# Altium PCB ESP32-38PIN.PcbDoc
Units mm, origin at the board's own origin, x right, y up, seen from the top; angles counter-clockwise.
Board outline 67.9 x 97.1 mm, 2 copper layers (Top Layer, Bottom Layer); 17 components, 39 nets, 187 pads, 12 vias.
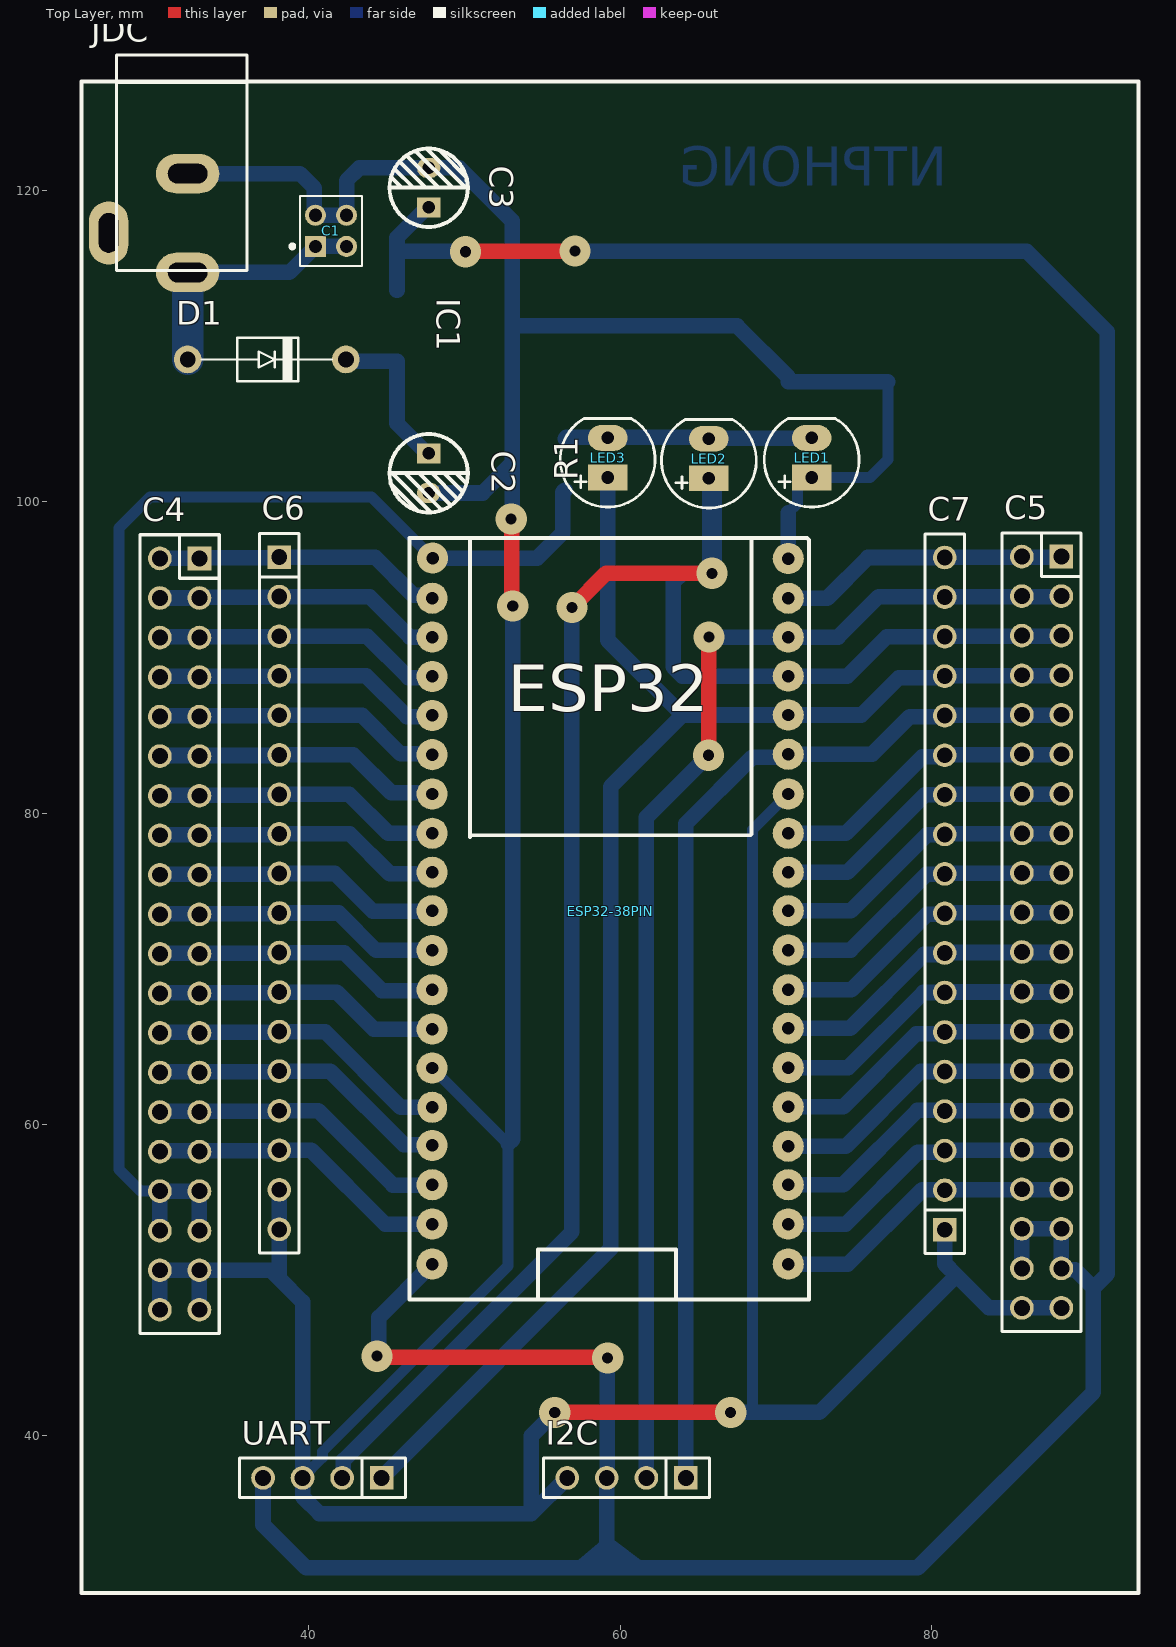
[diagram p0: Top Layer view]
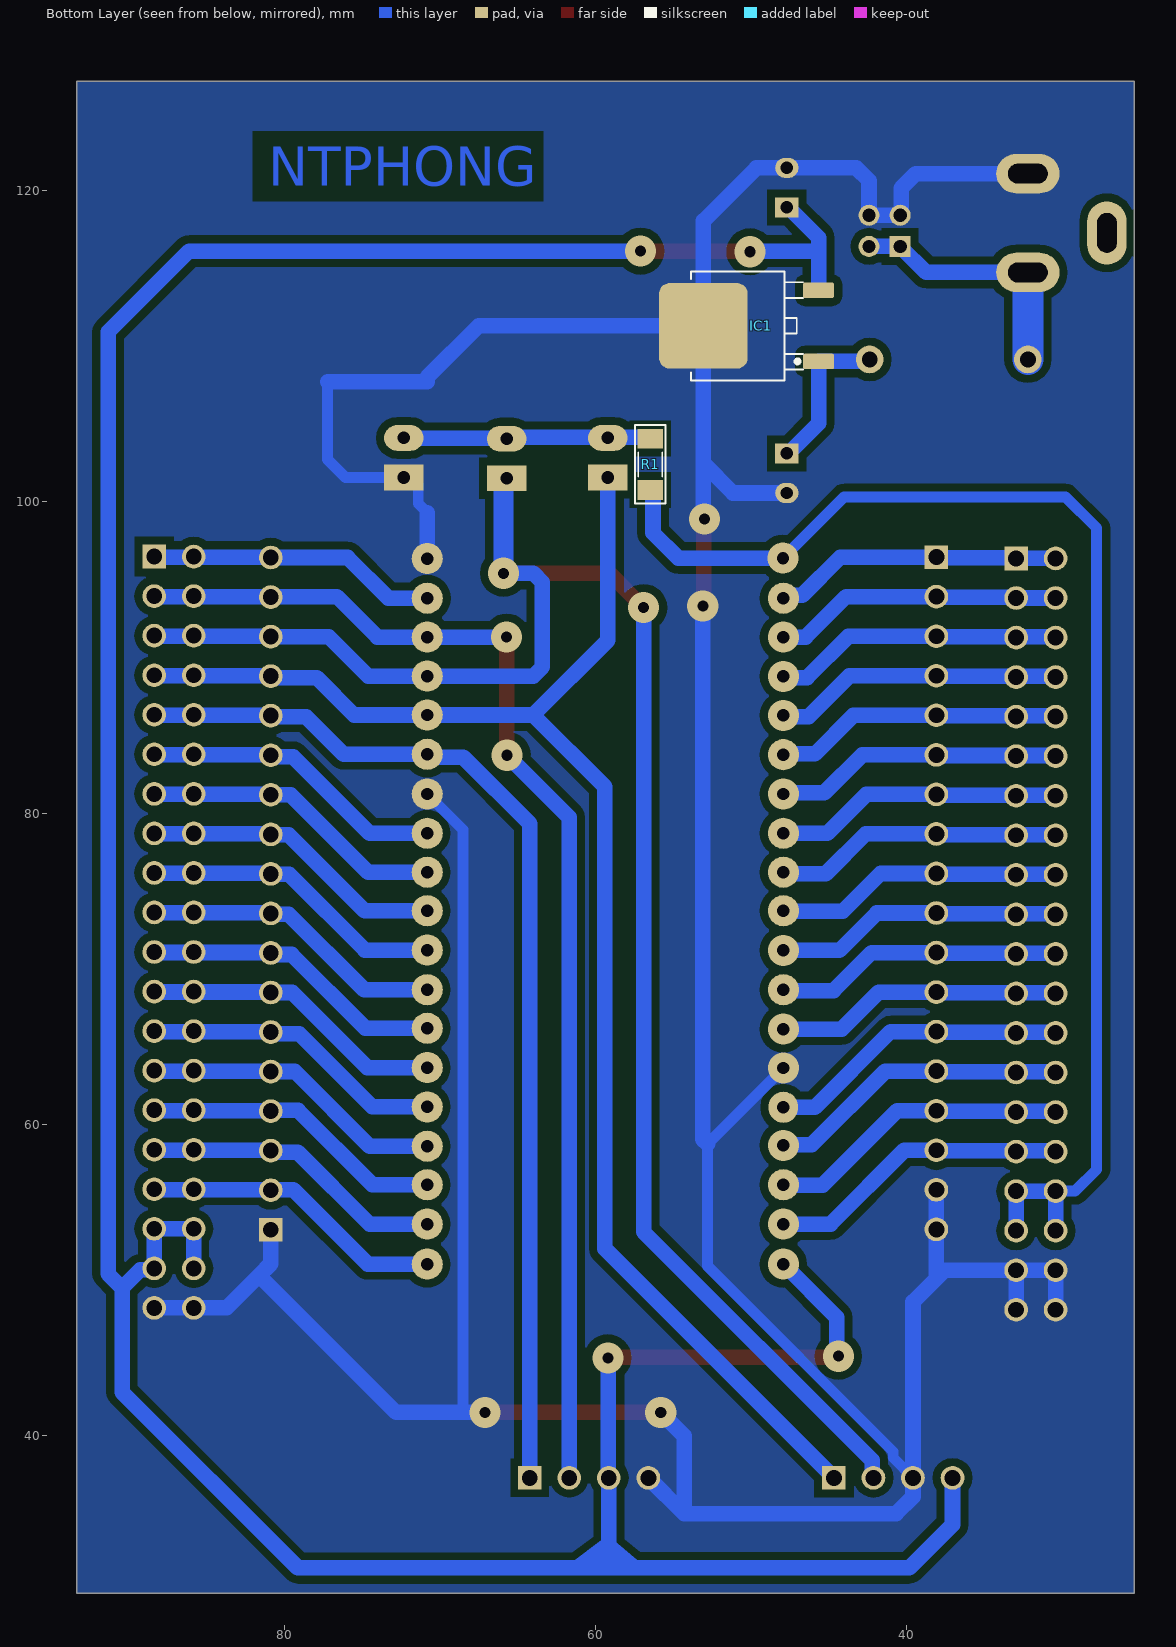
[diagram p1: Bottom Layer view, seen from below]
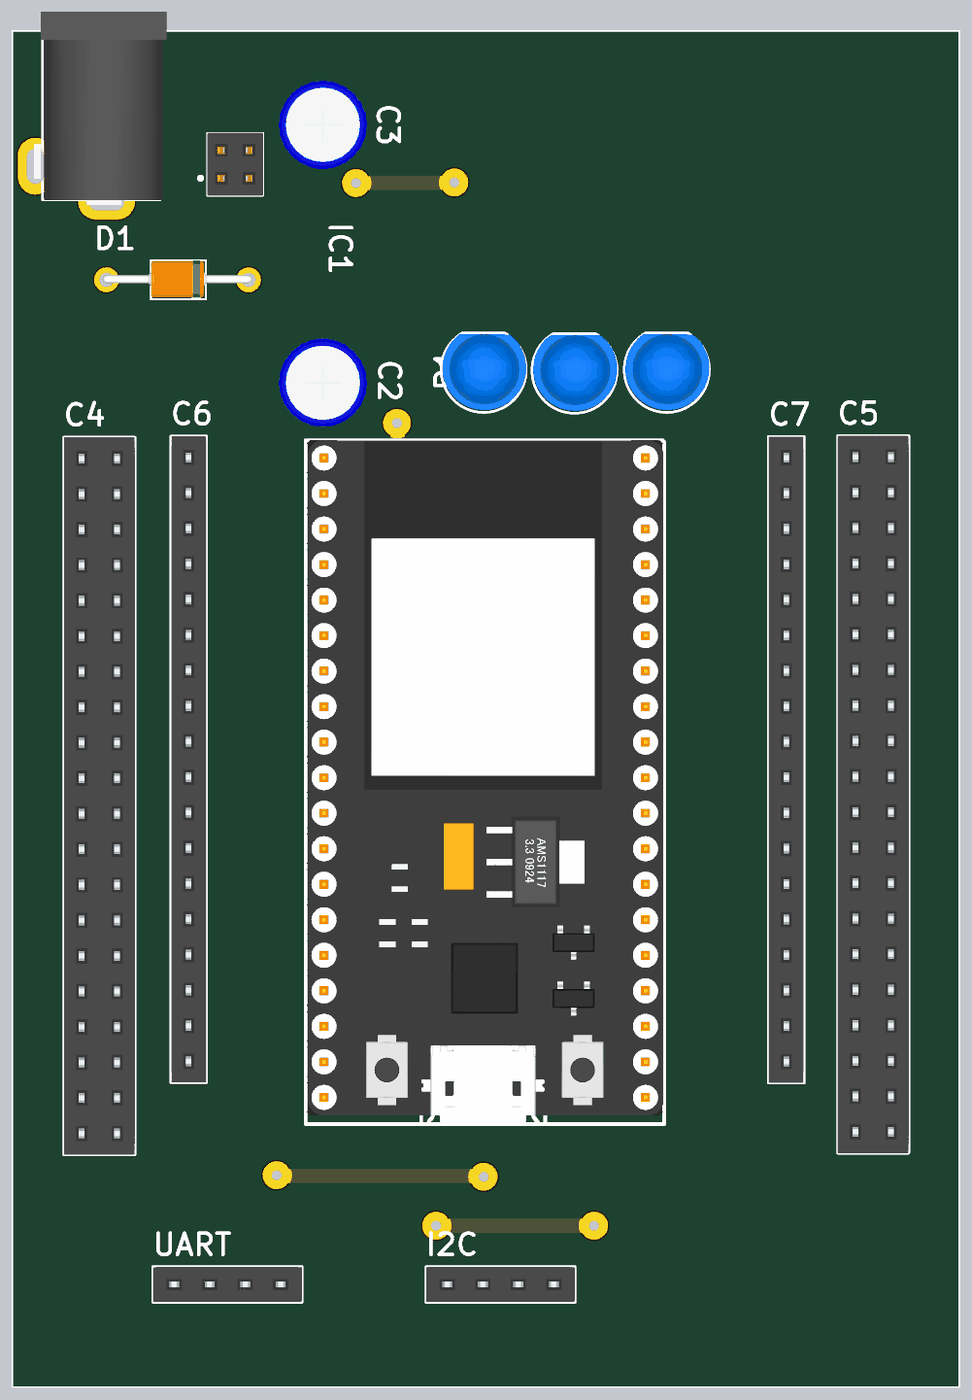
[diagram p2: 3D render of the assembled board from above, using the file's embedded part models]

## Layer stack, top to bottom
Top Solder: solder mask 0.0102, Solder Resist, Dk 3.5
Top Layer: signal copper 0.0356
Dielectric 1: dielectric 0.32, FR-4, Dk 4.8
Bottom Layer: signal copper 0.0356
Bottom Solder: solder mask 0.0102, Solder Resist, Dk 3.5

## Board outline
25.4,29.9 93.3,29.9 93.3,127 25.4,127

## Design rules (kind name [scope] priority, off if disabled: settings)
Clearance [All] p1: gap=0.5 ignorepadtopadclearanceinfootprint=FALSE
PlaneConnect [All] p1: planeconnectstyle=Direct reliefexpansion=0.508 reliefentries=4 reliefconductorwidth=0.254 reliefairgap=0.254
PolygonConnect [All] p1: connectstyle=Direct reliefconductorwidth=0.254 reliefentries=4 polygonreliefangle="90 Angle" airgapwidth=0.254
RoutingVias [All] p1: holewidth=0.711 width=2 viastyle="Through Hole" minholewidth=0.711 minwidth=1 maxholewidth=0.711 maxwidth=8
SolderMaskExpansion [All] p1: expansion=0.102 istentingtop=FALSE
Width [All] p1: maxlimit=5 minlimit=0.254 preferedwidth=0.7 minimp=50.000000 maximp=50.000000 favimp=50.000000
29 further rules are at their usual default settings.

## Components (designator, comment, footprint, x,y, rotation, side; value= is the part's Value field where it differs from the comment)
C1 "JP2x2-2.0" J2-C2T 41.425,117.4 r90 top
C2 "100uF" "tu hoa 5mm" 47.7,101.83 r270 top
C3 "100uF" "tu hoa 5mm" 47.7,120.17 r90 top
C4 "JP20x2" JP20-C2T 31.705,72.225 r270 top
C5 "JP20x2" JP20-C2T 87.07,72.345 r270 top
C6 "JP18" JP18-C1T 38.1,96.44 r270 top
C7 "JP18" JP18-C1T 80.85,53.235 r90 top
D1 "Diode" DIO-1A 32.221,109.137 r0 top value=1N5007
ESP32-38PIN "ESP32-38PIN" ESP32-38PIN 47.95,96.375 r0 top
I2C "JP4" JP4-C1T 64.22,37.3 r180 top
IC1 "LM78xx" TO252-123 49.366,111.296 r90 bottom
JDC "Jac DC" DC0 29.681,117.9 r270 top
LED1 "LED" LED-5-BLUE 72.3,102.7 r90 top value="LED 3 ly Single Colour"
LED2 "LED" LED-5-BLUE 65.7,102.643 r90 top value="LED 3 ly Single Colour"
LED3 "LED" LED-5-BLUE 59.2,102.7 r90 top value="LED 3 ly Single Colour"
R1 "68R" RES-SMD-1206 56.474,102.4 r90 bottom
UART "JP4" JP4-C1T 44.68,37.3 r180 top

## Footprints (in the part's own frame and the unit in brackets; to place one, negate y for a bottom-side part, rotate by r counter-clockwise, add the part's x,y. Pads: shape width x height; smd on the part's side, far side on the other; paste and mask are expansions set on the pad)
DC0 [mil] "Jac DC input"
  oval 100x160 hole 50 slot 100 at 90 deg: 1(125,100) 2(-125,100)
  oval 160x100 hole 50 slot 100 at 0 deg: 3(25,-100)
  silkscreen extent -425,-80 120,250, body extent -410,-105 134,269, height 434
DIO-1A [mil]
  round 70 hole 40: 1(0,0) 2(400,0)
  silkscreen extent 35,-55 365,55, body extent -11,-50 411,54, height 102
ESP32-38PIN [mm] "ESP32-38PIN"
  round 2 hole 0.8: 1(0,0) 2(-0.025,-2.575) 3(-0.025,-5.075) 4(-0.025,-7.6) 5(-0.025,-10.1) 6(-0.025,-12.625) 7(-0.025,-15.15) 8(-0.025,-17.675) 9(-0.025,-20.175) 10(-0.025,-22.65) 11(-0.025,-25.2) 12(-0.025,-27.725) 13(-0.025,-30.25) 14(-0.025,-32.75) 16(-0.025,-37.725) 17(-0.025,-40.25) 18(-0.025,-42.775) 19(-0.025,-45.35) 20(22.85,-45.35) 21(22.85,-42.775) 22(22.85,-40.25) 23(22.85,-37.775) 24(22.85,-35.25) 25(22.85,-32.725) 26(22.85,-30.2) 27(22.85,-27.725) 28(22.85,-25.175) 29(22.85,-22.65) 30(22.85,-20.175) 31(22.85,-17.675) 32(22.85,-15.15) 33(22.85,-12.6) 34(22.85,-10.075) 35(22.85,-7.575) 36(22.85,-5.075) 37(22.85,-2.575) 38(22.85,-0.025)
  oval 1.9x2 hole 0.8: 15(-0.025,-35.275)
  silkscreen extent -1.48,-47.61 24.17,1.29, body extent -1.44,-47.61 24.11,1.29, height 4.63
J2-C2T [mm] "4 pins, dual row, straight, gold plating"
  rect 1.35x1.35 hole 0.85: 1(-1,1)
  round 1.35 hole 0.85: 2(1,1) 3(1,-1) 4(-1,-1)
  silkscreen extent -2.25,-2 2.25,2.61, body extent -2.25,-2 2.25,2, height 4.31
JP4-C1T [mm] "4 row, straight, gold plating"
  rect 1.52x1.52 hole 1.02: 1(0,0)
  round 1.52 hole 1.02: 2(2.54,0) 3(5.08,0) 4(7.62,0)
  silkscreen extent -1.52,-1.27 9.14,1.27, body extent -1.52,-1.25 9.14,1.25, height 8.51
JP18-C1T [mm] "18 row, straight, gold plating"
  rect 1.52x1.52 hole 1.02: 1(0,0)
  round 1.52 hole 1.02: 2(2.54,0) 3(5.08,0) 4(7.62,0) 5(10.16,0) 6(12.7,0) 7(15.24,0) 8(17.78,0) 9(20.32,0) 10(22.86,0) 11(25.4,0) 12(27.94,0) 13(30.48,0) 14(33.02,0) 15(35.56,0) 16(38.1,0) 17(40.64,0) 18(43.18,0)
  silkscreen extent -1.52,-1.27 44.7,1.27, body extent -1.52,-1.25 44.7,1.25, height 8.51
JP20-C2T [mm] "40 pins, dual row, straight, gold plating"
  rect 1.52x1.52 hole 1.02: 1(-24.13,1.27)
  round 1.52 hole 1.02: 2(-21.59,1.27) 3(-19.05,1.27) 4(-16.51,1.27) 5(-13.97,1.27) 6(-11.43,1.27) 7(-8.89,1.27) 8(-6.35,1.27) 9(-3.81,1.27) 10(-1.27,1.27) 11(1.27,1.27) 12(3.81,1.27) 13(6.35,1.27) 14(8.89,1.27) 15(11.43,1.27) 16(13.97,1.27) 17(16.51,1.27) 18(19.05,1.27) 19(21.59,1.27) 20(24.13,1.27) 21(24.13,-1.27) 22(21.59,-1.27) 23(19.05,-1.27) 24(16.51,-1.27) 25(13.97,-1.27) 26(11.43,-1.27) 27(8.89,-1.27) 28(6.35,-1.27) 29(3.81,-1.27) 30(1.27,-1.27) 31(-1.27,-1.27) 32(-3.81,-1.27) 33(-6.35,-1.27) 34(-8.89,-1.27) 35(-11.43,-1.27) 36(-13.97,-1.27) 37(-16.51,-1.27) 38(-19.05,-1.27) 39(-21.59,-1.27) 40(-24.13,-1.27)
  silkscreen extent -25.65,-2.54 25.65,2.54, body extent -25.65,-2.54 25.65,2.54, height 8.51
LED-5-BLUE [mil] "LED 2 PIN, 5 ly , Only colour, pin to pin 110mil"
  rect 65x100 hole 32: 1(-45,0)
  oval 65x100 hole 32: 2(55,0)
  silkscreen extent -120,-120 104,120, body extent -113,-120 100,116, height 339
RES-SMD-1206 [mil]
  rect 50x65 smd: 1(-65,0) 2(65,0)
  silkscreen extent -99,-38 99,39, body extent -63,-31 63,32, height 40
TO252-123 [mm]
  round 0.5 on Mech15: 0(0,0)
  rrect25% 1x2 smd: 1(-2.285,-3.7) 3(2.285,-3.7)
  rrect25% 5.5x5.7 smd: 2(0,3.7)
  silkscreen extent -3.5,-2.7 3.5,4.5, body extent -3.3,-3.95 3.3,5.76, height 2.31
"tu hoa 5mm" [mm]
  rect 1.3x1.5 hole 0.8: 1(-1.27,0)
  oval 1.3x1.5 hole 0.8: 2(1.27,0)
  silkscreen extent -2.51,-2.51 2.51,2.51, body extent -3.12,-3.18 3.23,3.18, height 14.55

## Part data
C1: "WR-PHD 2.00 mm Dual Pin Header", Manufacturer="W¨¹rth Elektronik eiSos GmbH", partNo=62000421121, ComponentLink1 Description=Manufacturer, ComponentLink1URL=http://www.we-online.com, ComponentLink2 Description=Datasheet, ComponentLink2URL=http://katalog.we-online.de/em/datasheet/6200xx21121.pdf, Created by="Karrer Zheng", Created Date="2 April 2013", NoPins=04
C2 C3: library part "Tu Hoa 100uF 16V 5x11", "Cắm", Chung_Loai=Cắm, Don_Vi=Con, Ma_Hang=MH008417, So_Chan=2, Ten_Linh_Kien="Tụ Hóa 100uF 16V 5x11MM"
C4 C5: "WR-PHD 2.54 mm Dual Socket Header", Manufacturer="W¨¹rth Elektronik eiSos GmbH", partNo=61304021821, ComponentLink1 Description=Manufacturer, ComponentLink1URL=http://www.we-online.com, ComponentLink2 Description=Datasheet, ComponentLink2URL=http://katalog.we-online.de/em/datasheet/6130xx21821.pdf, Created by="Karrer Zheng", Created Date="29 March 2013", NoPins=40
C6 C7: "WR-PHD 2.54 mm Angled Socket Header", Manufacturer="W¨¹rth Elektronik eiSos GmbH", partNo=613018143121, ComponentLink1 Description=Manufacturer, ComponentLink1URL=http://www.we-online.com, ComponentLink2 Description=Datasheet, ComponentLink2URL=http://katalog.we-online.de/em/datasheet/6130xx143121.pdf, Created by="Karrer Zheng", Created Date="29 March 2013", NoPins=18
D1: "Default Diode", Code - JEDEC=DO-214-AB, Published=8-Jun-2000, Publisher="Altium Limited", Revision="July-2002: Re-released for DXP Platform."
I2C UART: "WR-PHD 2.54 mm Angled Socket Header", Manufacturer="W¨¹rth Elektronik eiSos GmbH", partNo=613004143121, ComponentLink1 Description=Manufacturer, ComponentLink1URL=http://www.we-online.com, ComponentLink2 Description=Datasheet, ComponentLink2URL=http://katalog.we-online.de/em/datasheet/6130xx143121.pdf, Created by="Karrer Zheng", Created Date="29 March 2013", NoPins=04
IC1: "Positive Voltage Regulator", ComponentLink1Description="Manufacturer Link", ComponentLink1URL=http://www.st.com/, ComponentLink2Description=Datasheet, ComponentLink2URL=http://www.st.com/stonline/products/literature/ds/2146/l78m05c.pdf, DatasheetVersion=Apr-1994, LatestRevisionDate=17-Jul-2002, LatestRevisionNote="Re-released for DXP Platform.", Note="Tab is connected to pin 3 (GND).", PackageDescription="TO, Thru-Hole, Vertical, Heatsink Mounted; 3 In-Line Leads; Pitch 2.54 mm; Pin sequence 1, 3, 2", PackageReference=ISOWATT220AB, PackageVersion=Jul-1998, Published=24-Aug-2001, Publisher="Altium Limited"
JDC: library part DCIN, "Jac DC input"
LED1 LED2 LED3: "LED Single colour Green and Red"
R1: library part Res-SMD, "Resistor", Manufacturer="Generic Components", Class=Passive, Published=08/06/2000, Publisher="Altium Hobart Technology Centre"

## Via types
v1: diameter 2, hole 0.711, Top Layer to Bottom Layer, 12 vias

## Nets (pads, with @x,y where several pads share a name; then routed paths per layer and width w, separated by ;. In a path a pad name is that pad's centre, name@x,y a point inside that pad or via, vN(x,y) a via of type N, cw(c..) or ccw(c..) an arc to the next point about the centre after c; other vN are vias at no path point)
+3.3: C4.17 C4.18 C4.23 C4.24 ESP32-38PIN.1 R1.1 | length 86.5
  Bottom Layer w0.7: C4.24 29.185,55.715 27.8,57.1 27.8,98.3 29.8,100.3 44.025,100.3 ESP32-38PIN.1
  Bottom Layer w1: C4.23 C4.24 C4.17 C4.18 ; ESP32-38PIN.1 54.675,96.375 56.3,98 56.3,100.614 56.435,100.749 R1.1
+5: C3.1 C5.18 C5.19 C5.22 C5.23 ESP32-38PIN.19 I2C.3 IC1.3 UART.4 | length 230.6
  Top Layer w1: v1(44.387,45.113) 44.45,45.05 59.15,45.05 v1(59.2,45) ; v1(50.068,116.057) 50.09,116.078 57.078,116.078 v1(57.1,116.1)
  Bottom Layer w1: UART.4 37.06,34.286 39.827,31.519 59.14,31.519 ; v1(44.387,45.113) 44.5,45.225 44.5,47.6 ESP32-38PIN.19 ; IC1.3 45.666,116.1 ; C3.1 47.6,118.9 45.666,116.966 45.666,116.1 ; v1(50.068,116.057) 50.025,116.1 45.666,116.1 ; v1(57.1,116.1) 86.1,116.1 91.3,110.9 91.3,50.4 90.4,49.5 ; v1(59.2,45) 59.17,44.97 59.17,37.33 I2C.3 59.14,31.519 ; C5.22 C5.23 C5.18 C5.19 88.439,50.656 89.245,50.656 90.4,49.5 ; 59.14,31.519 79.119,31.519 90.4,42.8 90.4,49.5
GND: C1.2 C1.3 C2.2 C3.2 C4.19 C4.20 C4.21 C4.22 C5.20 C5.21 C6.17 C6.18 C7.1 ESP32-38PIN.14 ESP32-38PIN.32 ESP32-38PIN.38 I2C.4 IC1.2 JDC.2 LED1.1 UART.3 | length 308.1
  Top Layer w1: v1(53,98.9) 53.05,98.85 53.05,93.35 v1(53.1,93.3) ; v1(55.8,41.5) v1(67.1,41.5)
  Bottom Layer w0.7: UART.3 39.6,37.324 40.868,38.592 40.868,38.977 52.8,50.909 52.8,58.75 ESP32-38PIN.14 ; 68.5,41.5 68.5,78.925 ESP32-38PIN.32 ; 70.8,99.3 71.38,99.88 71.38,101.082 71.856,101.557 LED1.1 76.057,101.557 77.2,102.7 77.2,107.7
  Bottom Layer w1: C4.21 C4.22 C4.19 ; JDC.2 39.425,121.075 40.358,120.142 40.358,118.467 C1.2 C1.3 42.425,120.625 43.24,121.44 C3.2 49.66,121.44 53.066,118.034 IC1.2 ; C4.20 C4.19 ; C6.17 C6.18 38.1,50.1 ; C2.2 51.16,100.56 53.066,102.466 ; 52.8,58.75 53.1,59.05 v1(53.1,93.3) ; v1(53,98.9) 53.066,98.966 53.066,102.466 ; v1(55.8,41.5) 54.3,40 54.3,35 ; I2C.4 54.3,35 ; v1(67.1,41.5) 68.5,41.5 72.8,41.5 81.6,50.3 ; ESP32-38PIN.38 70.8,99.3 ; 70.8,107.7 77.2,107.7 ; 70.8,108 67.504,111.296 IC1.2 ; C7.1 80.85,51.05 81.6,50.3 ; C5.20 C5.21 83.685,48.215 81.6,50.3 ; C4.19 37.565,50.635 38.1,50.1 ; 38.1,50.1 39.6,48.6 UART.3 39.6,36.086 40.686,35 54.3,35 ; 53.066,102.466 IC1.2
NetC1_1: C1.1 C1.4 D1.1 JDC.1 | length 16.5
  Bottom Layer w1: JDC.1 38.75,114.725 C1.1 C1.4
  Bottom Layer w2: D1.1 JDC.1
NetC2_1: C2.1 D1.2 IC1.1 | length 10.1
  Bottom Layer w1: D1.2 42.507,109.011 IC1.1 45.666,105.034 47.6,103.1 C2.1
NetC4_1: C4.1 C4.40 C6.1 ESP32-38PIN.2 | length 18.6
  Bottom Layer w1: C4.40 C4.1 33.017,96.397 38.057,96.397 C6.1 44.26,96.44 46.709,93.991 47.734,93.991 ESP32-38PIN.2
NetC4_2: C4.2 C4.39 C6.2 ESP32-38PIN.3 | length 18.6
  Bottom Layer w1: C4.39 C4.2 33.017,93.857 38.057,93.857 C6.2 43.9,93.9 46.5,91.3 ESP32-38PIN.3
NetC4_3: C4.3 C4.38 C6.3 ESP32-38PIN.4 | length 18.7
  Bottom Layer w1: C4.38 30.477,91.317 38.057,91.317 C6.3 43.74,91.36 46.4,88.7 47.85,88.7 ESP32-38PIN.4
NetC4_4: C4.4 C4.37 C6.4 ESP32-38PIN.5 | length 18.6
  Bottom Layer w1: C4.37 30.477,88.777 38.057,88.777 C6.4 43.68,88.82 46.3,86.2 47.85,86.2 ESP32-38PIN.5
NetC4_5: C4.5 C4.36 C6.5 ESP32-38PIN.6 | length 18.6
  Bottom Layer w1: C4.36 30.477,86.237 38.057,86.237 C6.5 43.42,86.28 45.9,83.8 47.875,83.8 ESP32-38PIN.6
NetC4_6: C4.6 C4.35 C6.6 ESP32-38PIN.7 | length 18.6
  Bottom Layer w1: C4.35 30.477,83.697 38.057,83.697 C6.6 42.86,83.74 45.3,81.3 47.85,81.3 ESP32-38PIN.7
NetC4_7: C4.7 C4.34 C6.7 ESP32-38PIN.8 | length 18.6
  Bottom Layer w1: C4.34 30.477,81.157 38.057,81.157 C6.7 42.6,81.2 45.1,78.7 ESP32-38PIN.8
NetC4_8: C4.8 C4.33 C6.8 ESP32-38PIN.9 | length 18.6
  Bottom Layer w1: C4.33 30.478,78.618 38.058,78.618 C6.8 42.64,78.66 45.2,76.1 47.825,76.1 ESP32-38PIN.9
NetC4_9: C4.9 C4.32 C6.9 ESP32-38PIN.10 | length 18.5
  Bottom Layer w1: C4.32 30.478,76.078 38.058,76.078 C6.9 41.68,76.12 44.1,73.7 47.9,73.7 ESP32-38PIN.10
NetC4_10: C4.10 C4.31 C6.10 ESP32-38PIN.11 | length 18.5
  Bottom Layer w1: C4.31 30.478,73.538 32.975,73.538 38.058,73.538 C6.10 41.92,73.58 44.325,71.175 ESP32-38PIN.11
NetC4_11: C4.11 C4.30 C6.11 ESP32-38PIN.12 | length 18.6
  Bottom Layer w1: C4.30 30.478,70.998 32.975,70.998 38.058,70.998 C6.11 42.26,71.04 44.7,68.6 47.875,68.6 ESP32-38PIN.12
NetC4_12: C4.12 C4.29 C6.12 ESP32-38PIN.13 | length 18.5
  Bottom Layer w1: C4.29 30.478,68.458 38.058,68.458 C6.12 41.8,68.5 44.175,66.125 ESP32-38PIN.13
NetC4_13: C4.13 C4.28 C6.13 ESP32-38PIN.15 | length 19.5
  Bottom Layer w1: C4.28 30.478,65.918 32.975,65.918 38.058,65.918 C6.13 41.04,65.96 45.9,61.1 ESP32-38PIN.15
NetC4_14: C4.14 C4.27 C6.14 ESP32-38PIN.16 | length 19.5
  Bottom Layer w1: C4.27 30.478,63.378 38.058,63.378 C6.14 41.38,63.42 46.1,58.7 47.875,58.7 ESP32-38PIN.16
NetC4_15: C4.15 C4.26 C6.15 ESP32-38PIN.17 | length 19.5
  Bottom Layer w1: C4.26 30.478,60.838 38.058,60.838 C6.15 40.62,60.88 45.4,56.1 47.9,56.1 ESP32-38PIN.17
NetC4_16: C4.16 C4.25 C6.16 ESP32-38PIN.18 | length 19.5
  Bottom Layer w1: C4.25 30.478,58.298 32.975,58.298 38.058,58.298 C6.16 40.16,58.34 44.9,53.6 ESP32-38PIN.18
NetC5_1: C5.1 C5.40 C7.18 ESP32-38PIN.37 | length 18.6
  Bottom Layer w1: ESP32-38PIN.37 73.3,93.8 75.915,96.415 C7.18 80.88,96.445 88.31,96.445 C5.1
NetC5_2: C5.2 C5.39 C7.17 ESP32-38PIN.36 I2C.2 | length 79.4
  Top Layer w1: v1(65.675,83.716) 65.687,83.728 65.687,91.287 v1(65.7,91.3)
  Bottom Layer w1: I2C.2 61.68,79.721 v1(65.675,83.716) ; v1(65.7,91.3) ESP32-38PIN.36 74,91.3 76.6,93.9 80.825,93.9 C7.17 80.88,93.905 88.31,93.905 C5.2
NetC5_3: C5.3 C5.38 C7.16 ESP32-38PIN.35 LED2.1 UART.2 | length 112.5
  Top Layer w1: v1(56.9,93.2) 59.1,95.4 v1(65.9,95.4)
  Bottom Layer w1: UART.2 42.218,37.378 42.218,38.418 56.9,53.1 v1(56.9,93.2) ; v1(65.9,95.4) 63.986,95.4 63.4,94.814 63.4,89.386 63.986,88.8 ESP32-38PIN.35 74.6,88.8 77.135,91.335 C7.16 80.88,91.365 85.8,91.365 88.31,91.365 C5.3
  Bottom Layer w1.3: LED2.1 65.9,101.3 v1(65.9,95.4)
NetC5_4: C5.4 C5.37 C7.15 ESP32-38PIN.34 LED3.1 UART.1 | length 99.6
  Bottom Layer w1: UART.1 44.94,37.56 59.4,52.02 59.4,81.7 64,86.3 ; LED3.1 59.2,91.1 64,86.3 ; C5.4 88.31,88.825 85.8,88.825 80.88,88.825 C7.15 80.755,88.7 77.9,88.7 75.5,86.3 ESP32-38PIN.34 64,86.3
NetC5_5: C5.5 C5.36 C7.14 ESP32-38PIN.33 I2C.1 | length 69
  Bottom Layer w1: I2C.1 64.22,79.32 68.484,83.584 70.609,83.584 ESP32-38PIN.33 76.175,83.775 78.59,86.19 80.785,86.19 C7.14 80.88,86.285 88.31,86.285 C5.5
NetC5_6: C5.6 C5.35 C7.13 ESP32-38PIN.31 | length 19.6
  Bottom Layer w1: ESP32-38PIN.31 74.5,78.7 79.416,83.616 80.751,83.616 C7.13 80.88,83.745 88.31,83.745 C5.6
NetC5_7: C5.7 C5.34 C7.12 ESP32-38PIN.30 | length 19.6
  Bottom Layer w1: ESP32-38PIN.30 74.6,76.2 79.575,81.175 C7.12 80.88,81.205 85.8,81.205 88.31,81.205 C5.7
NetC5_8: C5.8 C5.33 C7.11 ESP32-38PIN.29 | length 19.6
  Bottom Layer w1: ESP32-38PIN.29 74.825,73.725 79.694,78.594 80.809,78.594 80.88,78.665 85.8,78.665 88.31,78.665 C5.8
NetC5_9: C5.9 C5.32 C7.10 ESP32-38PIN.28 | length 19.6
  Bottom Layer w1: ESP32-38PIN.28 74.8,71.2 79.674,76.074 80.829,76.074 80.88,76.125 85.8,76.125 88.31,76.125 C5.9
NetC5_10: C5.10 C5.31 C7.9 ESP32-38PIN.27 | length 19.6
  Bottom Layer w1: ESP32-38PIN.27 74.85,68.65 79.704,73.504 80.799,73.504 80.88,73.585 85.8,73.585 88.31,73.585 C5.10
NetC5_11: C5.11 C5.30 C7.8 ESP32-38PIN.26 | length 19.6
  Bottom Layer w1: ESP32-38PIN.26 74.775,66.175 79.516,70.916 80.751,70.916 80.88,71.045 85.8,71.045 88.31,71.045 C5.11
NetC5_12: C5.12 C5.29 C7.7 ESP32-38PIN.25 | length 19.6
  Bottom Layer w1: ESP32-38PIN.25 74.65,63.65 79.475,68.475 C7.7 80.88,68.505 85.8,68.505 88.31,68.505 C5.12
NetC5_13: C5.13 C5.28 C7.6 ESP32-38PIN.24 | length 19.6
  Bottom Layer w1: ESP32-38PIN.24 74.325,61.125 79.036,65.836 80.751,65.836 C7.6 80.88,65.965 88.31,65.965 C5.13
NetC5_14: C5.14 C5.27 C7.5 ESP32-38PIN.23 | length 19.6
  Bottom Layer w1: ESP32-38PIN.23 74.5,58.6 79.3,63.4 80.845,63.4 C7.5 80.88,63.425 85.8,63.425 88.31,63.425 C5.14
NetC5_15: C5.15 C5.26 C7.4 ESP32-38PIN.22 | length 19.6
  Bottom Layer w1: ESP32-38PIN.22 74.325,56.125 79.1,60.9 80.805,60.9 C7.4 80.88,60.885 88.31,60.885 C5.15
NetC5_16: C5.16 C5.25 C7.3 ESP32-38PIN.21 | length 19.5
  Bottom Layer w1: ESP32-38PIN.21 74.5,53.6 79.116,58.216 80.751,58.216 C7.3 80.88,58.345 88.31,58.345 C5.16
NetC5_17: C5.17 C5.24 C7.2 ESP32-38PIN.20 | length 19.6
  Bottom Layer w1: ESP32-38PIN.20 74.625,51.025 79.4,55.8 80.825,55.8 C7.2 80.88,55.805 88.31,55.805 C5.17
NetLED1_2: LED1.2 LED2.2 LED3.2 R1.2 | length 15.7
  Bottom Layer w1: R1.2 56.552,104.129 60,104.129 LED2.2@65.5,104.129 ; LED2.2@65.7,104.072 LED1.2@72.3,104.072
pads on no net: IC1.0 JDC.3

## Polygon pours and split planes (outlines as drawn)
GND on Bottom Layer "GND_L02_P000" (solid, remove dead copper, pour order 0): 25.4,127 93.3,127 93.3,29.9 25.4,29.9

## Other copper
Bottom Layer:
  region net +5: 59.2,33.6 56.7,31.5 62,31.5
  text "NTPHONG" at 81,120.3 h2.5

## Silkscreen, mask and mechanical layers (free items; w line width, h text height)
Top Overlay:
  the board outline again, w0.254

## Text inside footprints (layer, text, board x,y; h text height)
ESP32-38PIN: Top Overlay "ESP32" at 52.775,86.525 h3